# Altium PCB M3FMCWS_B.PcbDoc (part 1 of 2)
Units mil, origin at the board's own origin, x right, y up, seen from the top; angles counter-clockwise.
Board outline 3000 x 2800 mil, 4 copper layers (Top Layer, Layer 1, Layer 2, Bottom Layer), stack 60.556 mil thick; 145 components, 95 nets, 592 pads, 1074 vias.
Unrouted connection lines stored in the file: 9.
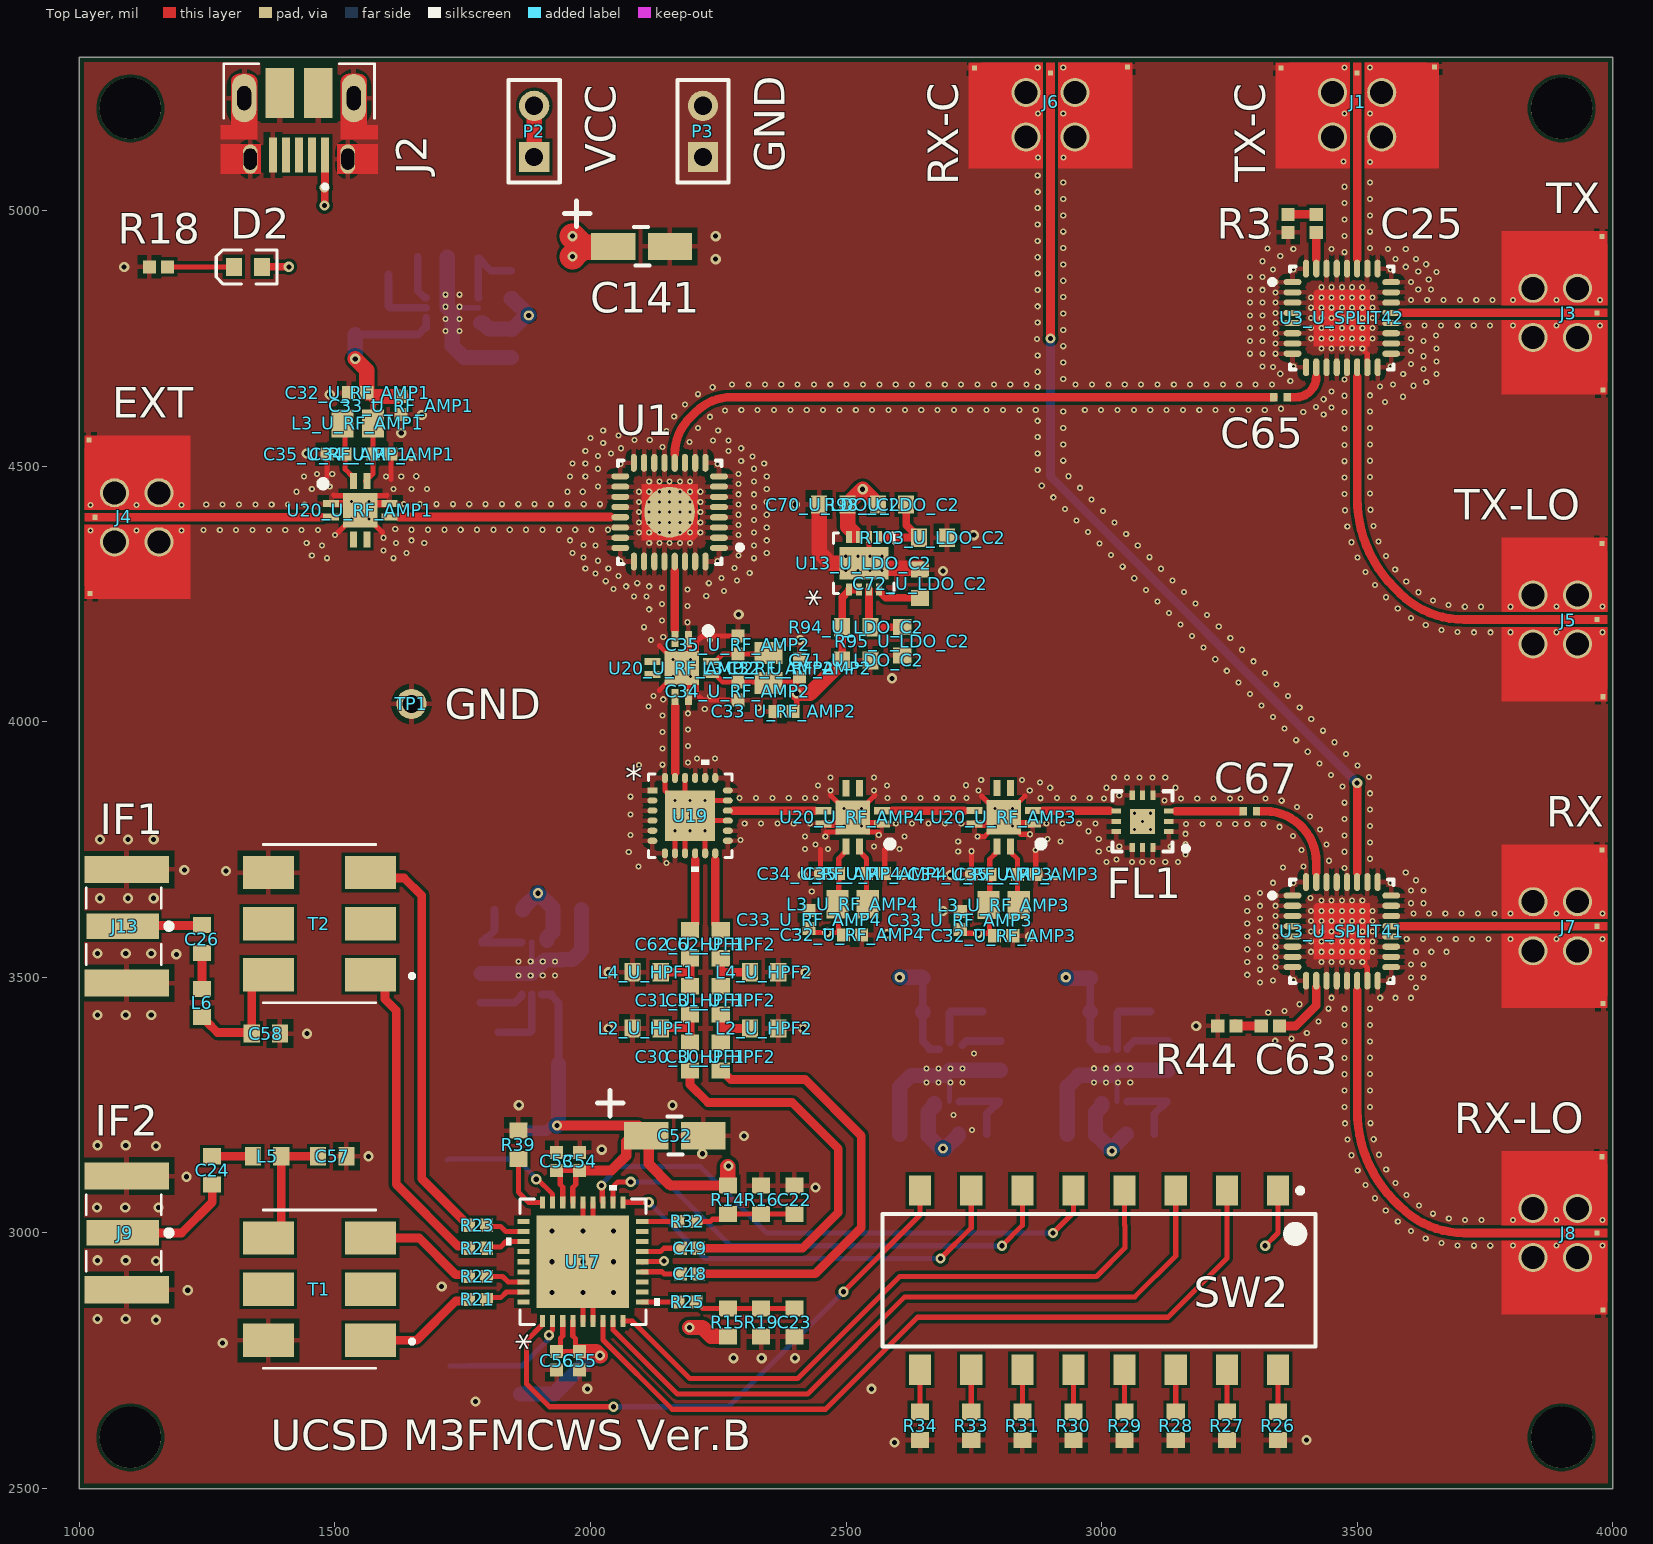
[diagram p0: Top Layer view]
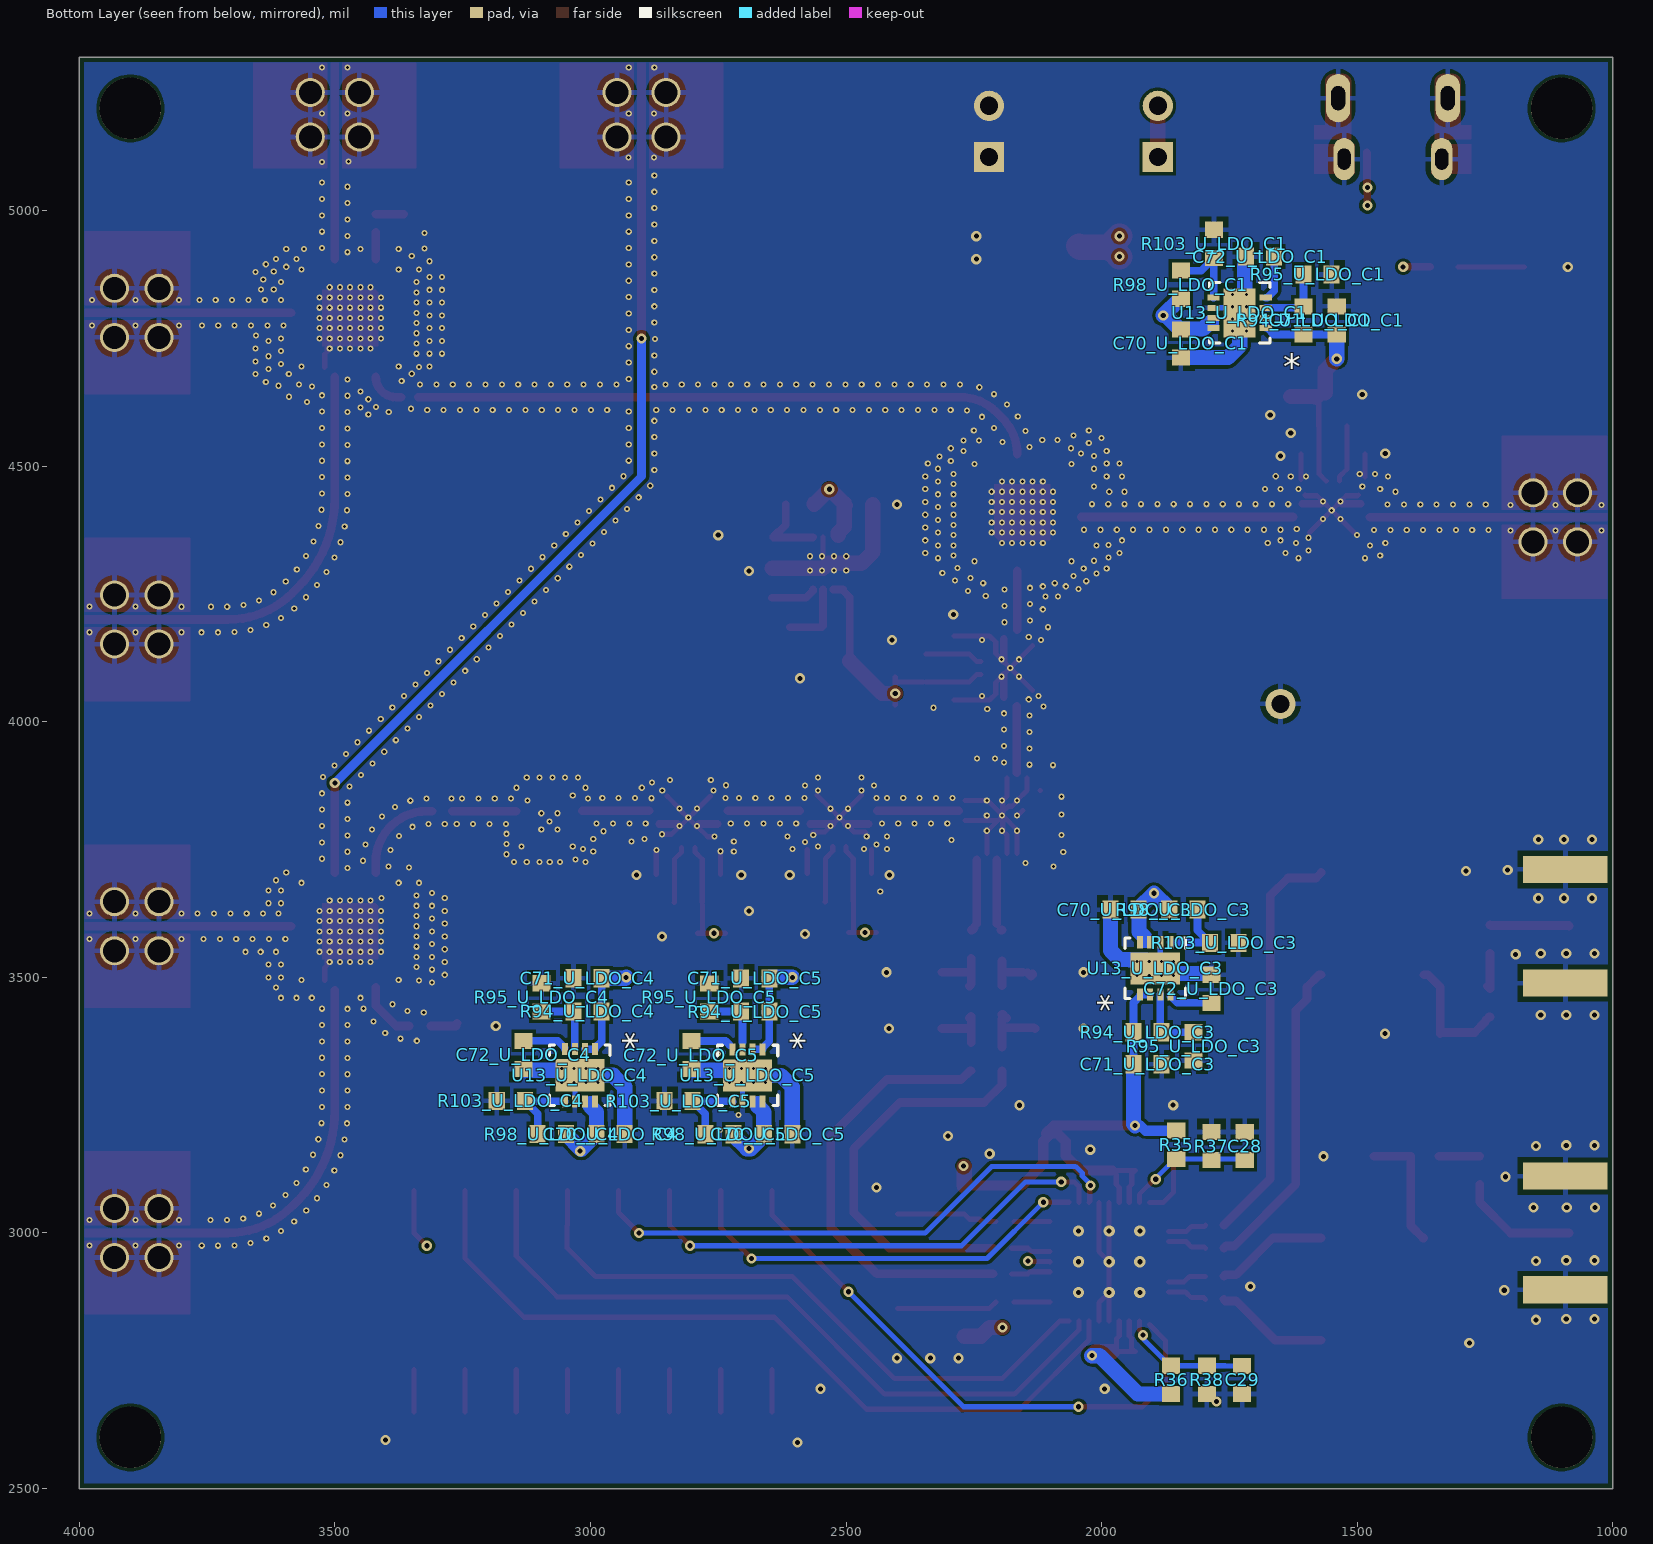
[diagram p1: Bottom Layer view, seen from below]
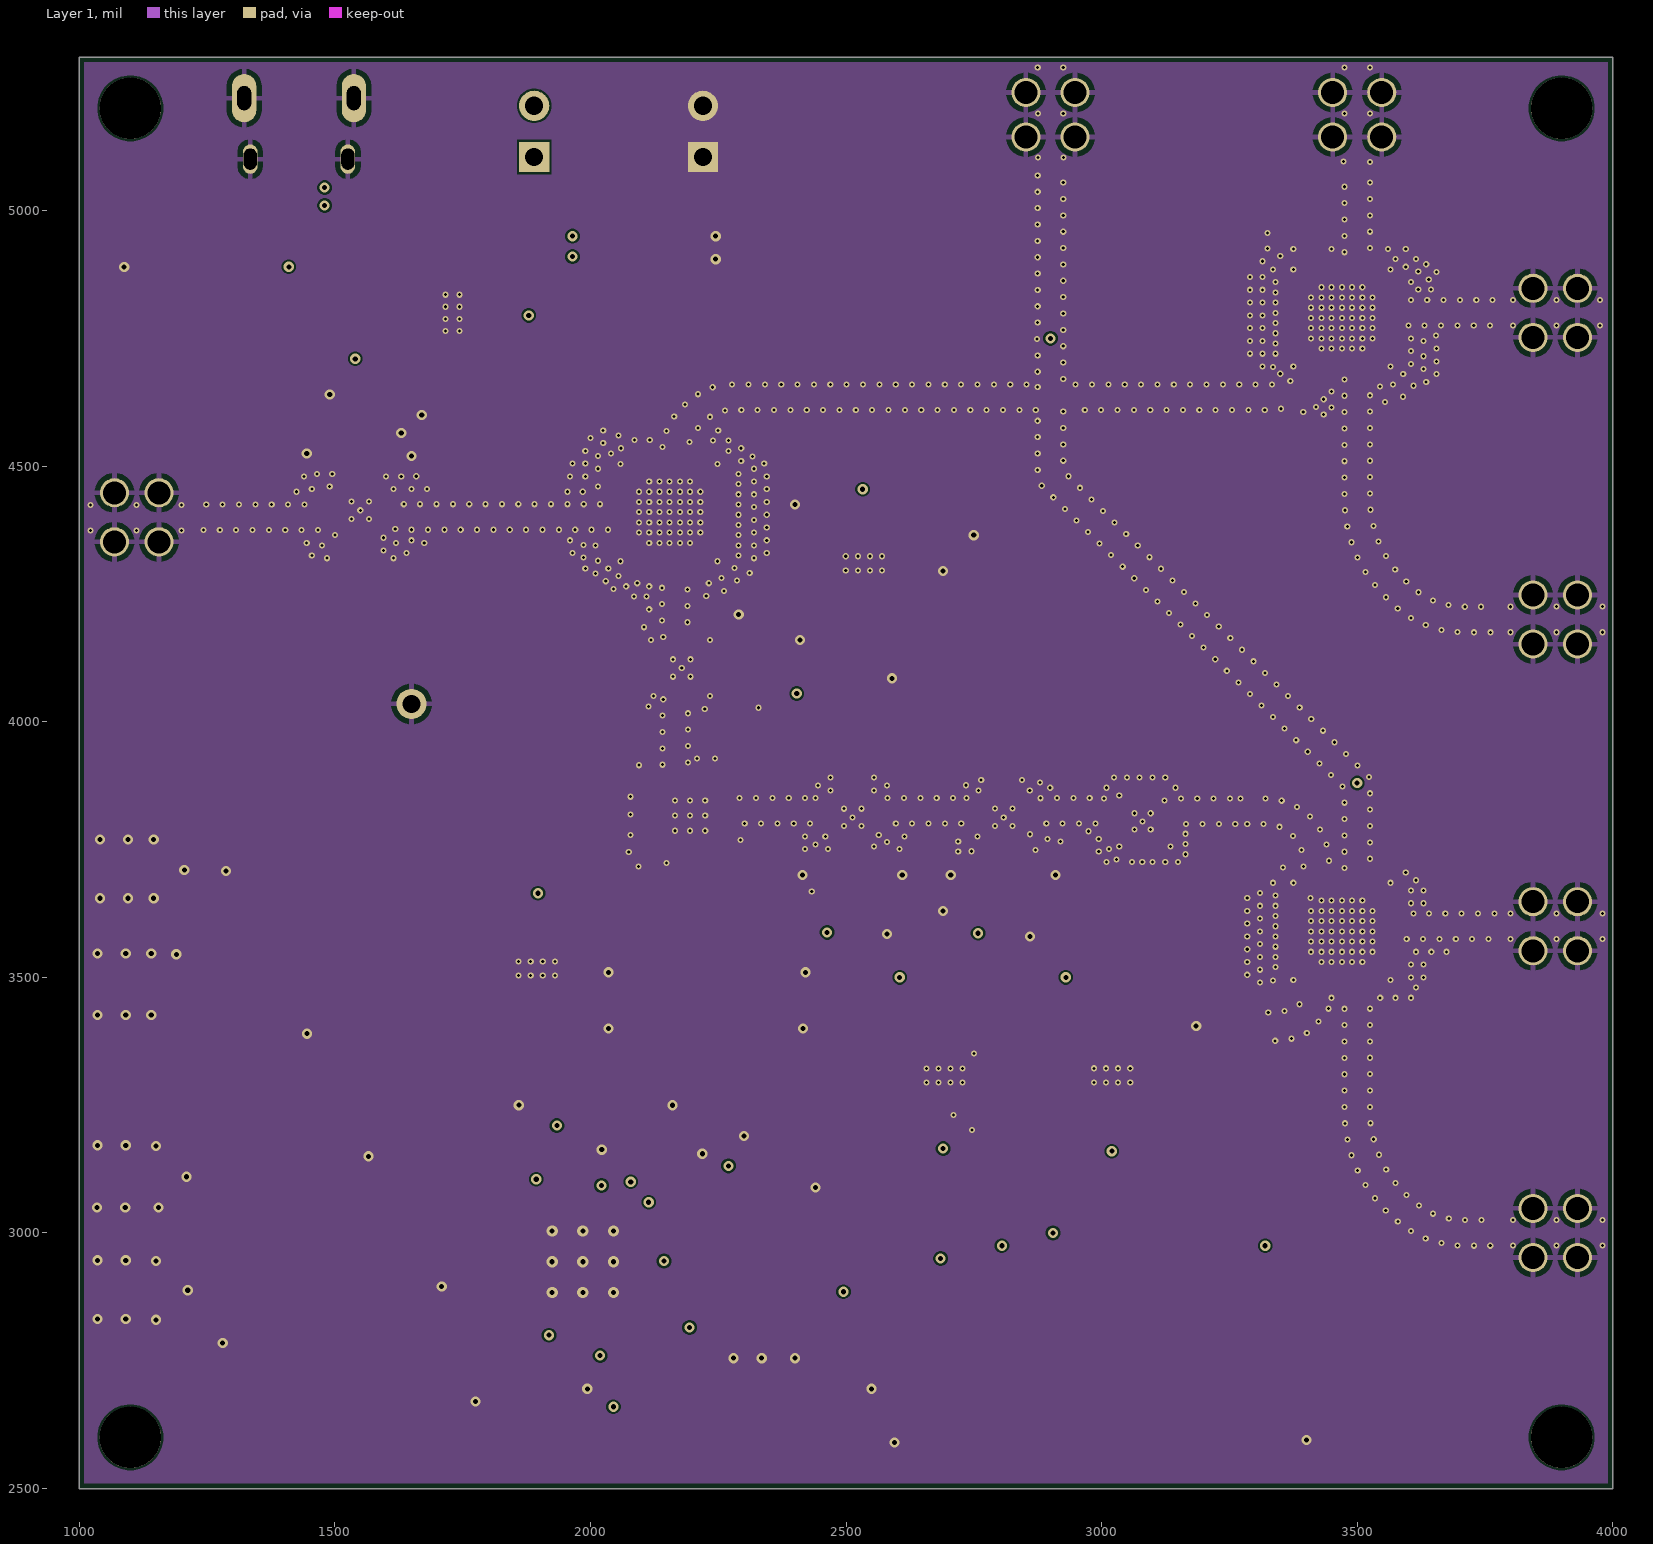
[diagram p2: Layer 1]
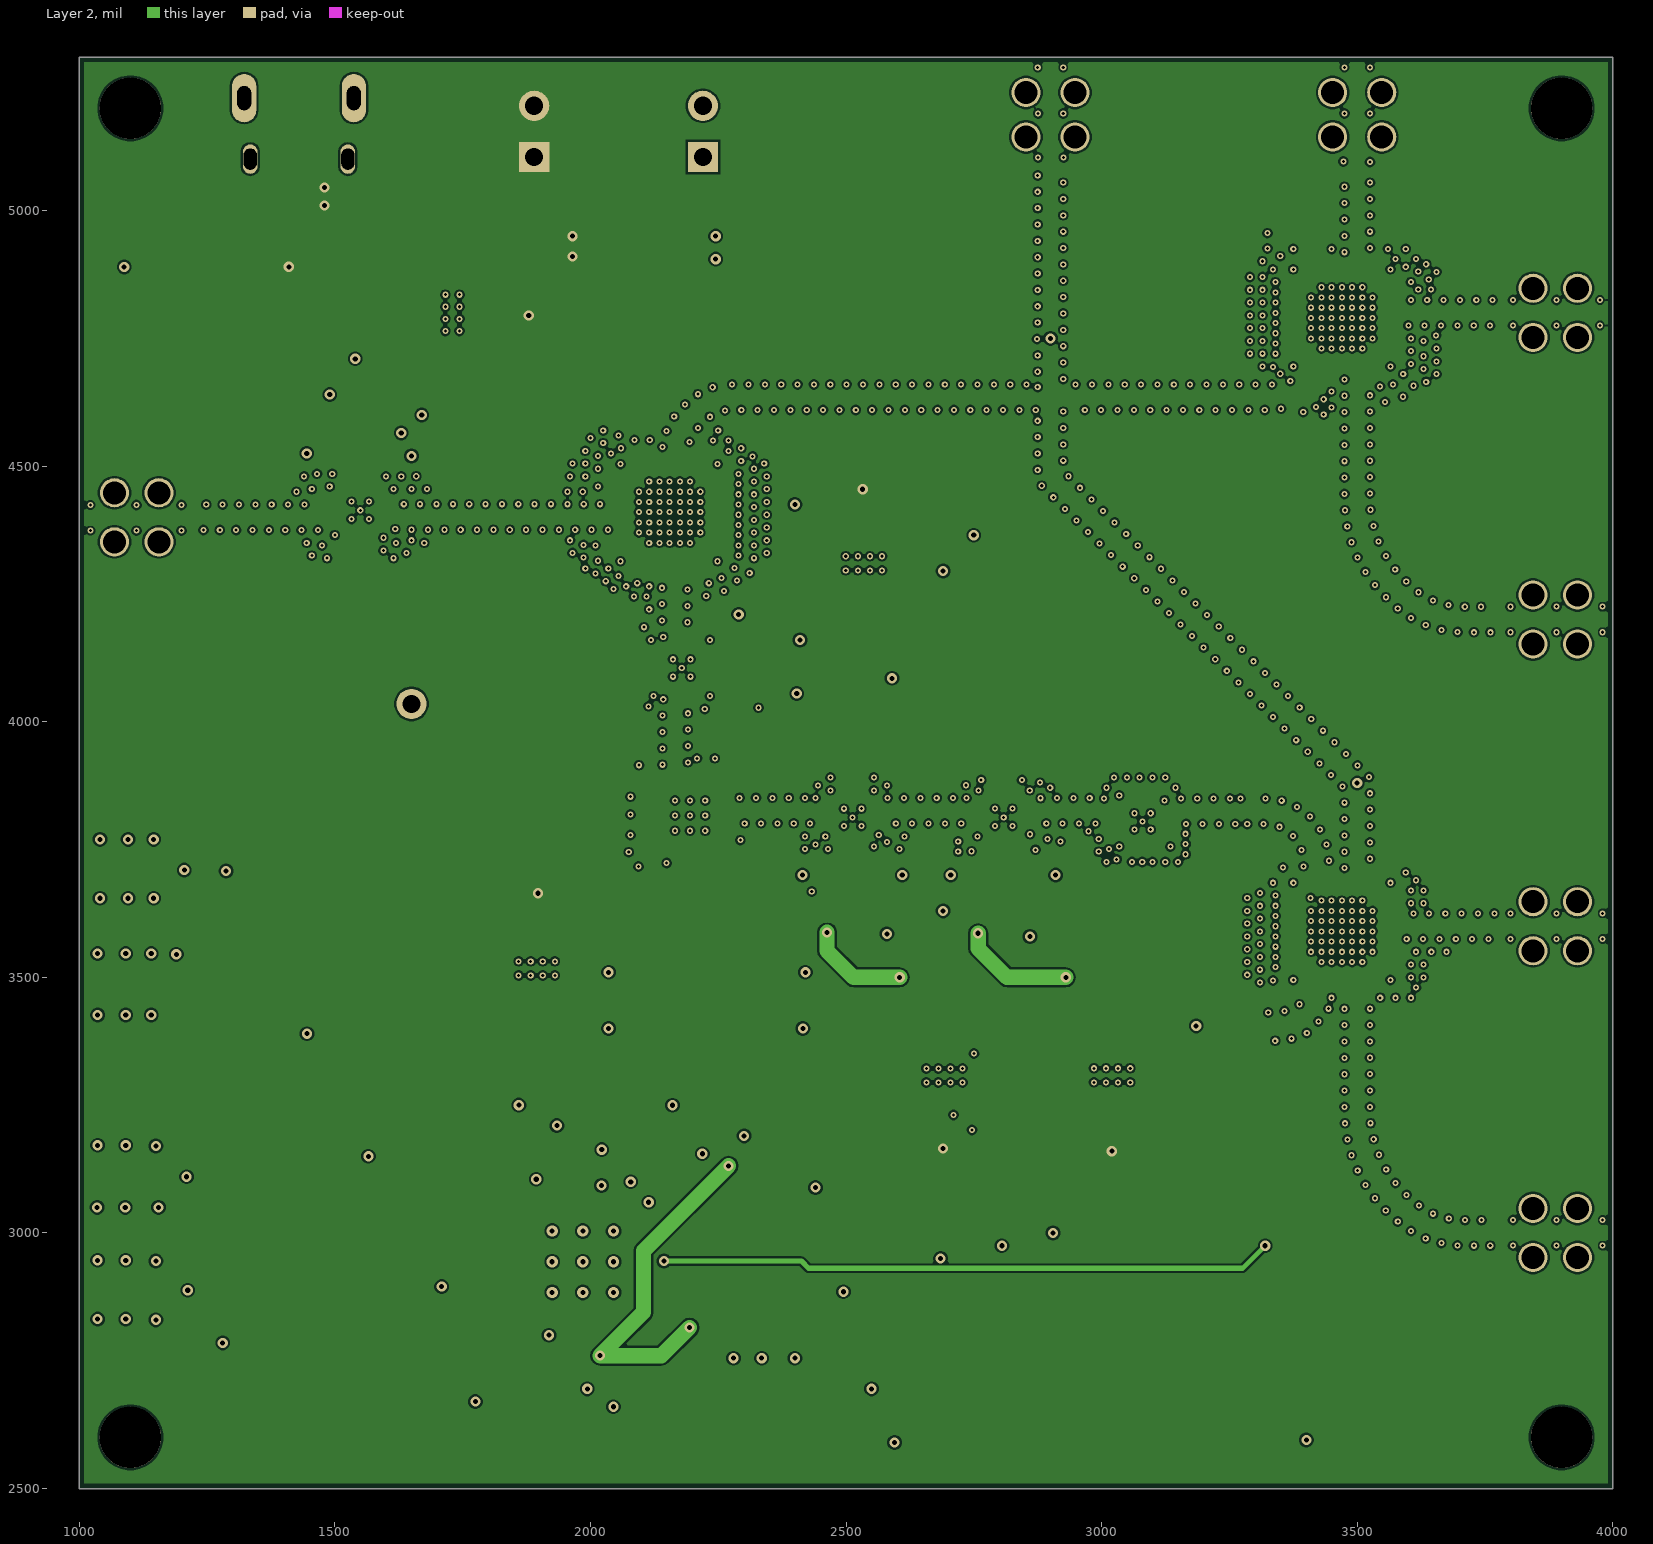
[diagram p3: Layer 2]

## Layer stack, top to bottom
Top Solder: solder mask 0.4, Solder Resist, Dk 3.5
Top Layer: signal copper 1.4
Dielectric 2: prepreg 10, RO4350, Dk 3.53
Layer 1: signal copper 1.378
Dielectric 1: core 35, FR4, Dk 4.8
Layer 2: signal copper 1.378
Dielectric 3: prepreg 10, RO4350, Dk 3.53
Bottom Layer: signal copper 1.4
Bottom Solder: solder mask 0.4, Solder Resist, Dk 3.5

## Board outline
1000,2500 4000,2500 4000,5300 1000,5300

## Design rules (kind name [scope] priority, off if disabled: settings)
BoardOutlineClearance [All] p1: gap=10 ignorepadtopadclearanceinfootprint=FALSE
Clearance BOT_POLY_POUR [InNamedPolygon('GND_L04_P019')] p1: gap=6 ignorepadtopadclearanceinfootprint=FALSE
Clearance TOP_POLY_POUR [InNamedPolygon('GND_L01_P016')] p2: gap=6 ignorepadtopadclearanceinfootprint=FALSE
Clearance [All] p3: gap=4 ignorepadtopadclearanceinfootprint=TRUE
ComponentClearance [All] p1: gap=4 collisioncheckmode=3 verticalgap=10 showdistances=FALSE
HoleSize [All] p1: absolutevalues=TRUE maxlimit=150 minlimit=1 maxpercent=80.000 minpercent=20.000
MinimumSolderMaskSliver [All] p1: minsoldermaskwidth=3.9
PlaneConnect [All] p1: pad.planeconnectstyle=Relief pad.reliefexpansion=20 pad.reliefentries=4 pad.reliefconductorwidth=10 pad.reliefairgap=10 via.planeconnectstyle=Direct via.reliefexpansion=20 via.reliefentries=4 via.reliefconductorwidth=10 via.reliefairgap=10
PolygonConnect [All] p1: thpad.connectstyle=Relief thpad.reliefconductorwidth=10 thpad.reliefentries=4 thpad.polygonreliefangle="90 Angle" thpad.airgapwidth=10 smdpad.connectstyle=Relief smdpad.reliefconductorwidth=10 smdpad.reliefentries=4 smdpad.polygonreliefangle="90 Angle" smdpad.airgapwidth=10 via.connectstyle=Direct via.reliefconductorwidth=10 via.reliefentries=4 via.polygonreliefangle="90 Angle" via.airgapwidth=10
RoomDefinition U_LDO_C5 [InComponentClass('U_LDO_C5')] p1: confinementstyle=ConfineIn formatcopy=TRUE lockcomponents=FALSE outline 2804.53,3161.1 2575.59,3161.1 2575.59,3225.04 2580.91,3225.04 2580.91,3399.72 2620.59,3399.72 2620.59,3530.04 2734.53,3530.04 2734.53,3517.6 2799.53,3517.6 2799.53,3405.04 2834.53,3405.04 2834.53,3290.04 2884.53,3290.04 2884.53,3226.1 2804.53,3226.1
RoomDefinition U_LDO_C4 [InComponentClass('U_LDO_C4')] p2: confinementstyle=ConfineIn formatcopy=TRUE lockcomponents=FALSE outline 3132.54,3161.35 2903.6,3161.35 2903.6,3225.29 2908.92,3225.29 2908.92,3399.97 2948.6,3399.97 2948.6,3530.29 3062.54,3530.29 3062.54,3517.85 3127.54,3517.85 3127.54,3405.29 3162.54,3405.29 3162.54,3290.29 3212.54,3290.29 3212.54,3226.35 3132.54,3226.35
RoomDefinition U_LDO_C1 [InComponentClass('U_LDO_C1')] p3: confinementstyle=ConfineIn formatcopy=TRUE lockcomponents=FALSE outline 1748.03,4991.97 1811.97,4991.97 1811.97,4911.97 1876.97,4911.97 1876.97,4683.03 1813.03,4683.03 1813.03,4688.35 1638.35,4688.35 1638.35,4728.03 1508.03,4728.03 1508.03,4841.97 1520.47,4841.97 1520.47,4906.97 1633.03,4906.97 1633.03,4941.97 1748.03,4941.97
RoomDefinition U_RF_AMP2 [InComponentClass('U_RF_AMP2')] p4: confinementstyle=ConfineIn formatcopy=TRUE lockcomponents=FALSE outline 2090,4016.53 2090,4195 2267.29,4195 2267.29,4191.57 2312.13,4191.57 2312.13,4166.26 2386.11,4166.26 2386.11,4146.57 2432.13,4146.57 2432.13,4063.77 2420.05,4063.77 2420.05,3996.69 2337.24,3996.69 2337.24,4016.53
RoomDefinition U_LDO_C2 [InComponentClass('U_LDO_C2')] p5: confinementstyle=ConfineIn formatcopy=TRUE lockcomponents=FALSE outline 2418.03,4456.97 2418.03,4393.03 2423.35,4393.03 2423.35,4218.35 2463.03,4218.35 2463.03,4088.03 2576.97,4088.03 2576.97,4100.47 2641.97,4100.47 2641.97,4213.03 2676.97,4213.03 2676.97,4328.03 2726.97,4328.03 2726.97,4391.97 2646.97,4391.97 2646.97,4456.97
RoomDefinition U_LDO_C3 [InComponentClass('U_LDO_C3')] p6: confinementstyle=ConfineIn formatcopy=TRUE lockcomponents=FALSE outline 1853.05,3298.03 1966.98,3298.03 1966.98,3425.91 2006.66,3425.91 2006.66,3600.59 2011.98,3600.59 2011.98,3664.53 1783.05,3664.53 1783.05,3599.53 1703.05,3599.53 1703.05,3535.59 1753.05,3535.59 1753.05,3420.59 1788.05,3420.59 1788.05,3308.03 1853.05,3308.03
RoomDefinition U_MIXER [InComponentClass('U_MIXER')] p7: confinementstyle=ConfineIn formatcopy=TRUE lockcomponents=FALSE outline 2059.26,3702.76 2059.26,3930 2300,3930 2300,3702.76
RoomDefinition U_RF_AMP4 [InComponentClass('U_RF_AMP4')] p8: confinementstyle=ConfineIn formatcopy=TRUE lockcomponents=FALSE outline 2404.5,3571.51 2404.5,3654.31 2424.35,3654.31 2424.35,3901.56 2602.82,3901.56 2602.82,3724.27 2599.39,3724.27 2599.39,3679.43 2574.08,3679.43 2574.08,3605.45 2554.39,3605.45 2554.39,3559.43 2471.59,3559.43 2471.59,3571.51
RoomDefinition U_RF_AMP3 [InComponentClass('U_RF_AMP3')] p9: confinementstyle=ConfineIn formatcopy=TRUE lockcomponents=FALSE outline 2700,3569.95 2700,3652.76 2719.84,3652.76 2719.84,3900 2898.31,3900 2898.31,3722.71 2894.89,3722.71 2894.89,3677.87 2869.57,3677.87 2869.57,3603.89 2849.89,3603.89 2849.89,3557.87 2767.09,3557.87 2767.09,3569.95
RoomDefinition U_RF_AMP1 [InComponentClass('U_RF_AMP1')] p10: confinementstyle=ConfineIn formatcopy=TRUE lockcomponents=FALSE outline 1638.47,4325 1460,4325 1460,4502.29 1461.14,4502.29 1461.14,4547.13 1483.74,4547.13 1483.74,4621.11 1503.43,4621.11 1503.43,4667.13 1586.23,4667.13 1586.23,4660.05 1653.31,4660.05 1653.31,4577.24 1638.47,4577.24
RoutingVias [All] p1: holewidth=8 width=20 viastyle="Through Hole" minholewidth=6 minwidth=12 maxholewidth=28 maxwidth=50
SilkToSilkClearance [All] p1: silktosilkclearance=4
SilkToSolderMaskClearance [IsPad] p1: minsilkscreentomaskgap=4 clearancetoexposedcopper=FALSE
SolderMaskExpansion [All] p1: expansion=2 istentingtop=FALSE
Width [All] p1: maxlimit=50 minlimit=4 preferedwidth=17
24 further rules are at their usual default settings.

## Classes and differential pairs
component class U_SPLIT2: U1
channel class SPLIT4: U_SPLIT41 U_SPLIT42
component class U_SPLIT41: U3_U_SPLIT41
component class U_SPLIT42: U3_U_SPLIT42
channel class HPF: U_HPF1 U_HPF2
channel class LDO_C: U_LDO_C1 U_LDO_C2 U_LDO_C3 U_LDO_C4 U_LDO_C5
channel class RF_AMP: U_RF_AMP1 U_RF_AMP2 U_RF_AMP3 U_RF_AMP4
component class U_RF_AMP4: C32_U_RF_AMP4 C33_U_RF_AMP4 C34_U_RF_AMP4 C35_U_RF_AMP4 L3_U_RF_AMP4 U20_U_RF_AMP4
component class U_RF_AMP3: C32_U_RF_AMP3 C33_U_RF_AMP3 C34_U_RF_AMP3 C35_U_RF_AMP3 L3_U_RF_AMP3 U20_U_RF_AMP3
component class U_RF_AMP2: C32_U_RF_AMP2 C33_U_RF_AMP2 C34_U_RF_AMP2 C35_U_RF_AMP2 L3_U_RF_AMP2 U20_U_RF_AMP2
component class U_RF_AMP1: C32_U_RF_AMP1 C33_U_RF_AMP1 C34_U_RF_AMP1 C35_U_RF_AMP1 L3_U_RF_AMP1 U20_U_RF_AMP1
component class U_POWER: C141 D2 J2 P2 P3 R18 TP1
component class U_MIXER: U19
component class U_HPF2: C30_U_HPF2 C31_U_HPF2 C62_U_HPF2 L2_U_HPF2 L4_U_HPF2
component class U_HPF1: C30_U_HPF1 C31_U_HPF1 C62_U_HPF1 L2_U_HPF1 L4_U_HPF1
component class U_BB_AMP: C22 C23 C24 C26 C28 C29 C48 C49 C52 C53 C54 C55 C56 C57 C58 L5 L6 R14 R15 R16 R19 R21 R22 R23 R24 R25 R26 R27 R28 R29 R30 R31 R32 R33 R34 R35 R36 R37 R38 R39 SW2 T1 T2 U17
component class U_LDO_C5: C70_U_LDO_C5 C71_U_LDO_C5 C72_U_LDO_C5 R94_U_LDO_C5 R95_U_LDO_C5 R98_U_LDO_C5 R103_U_LDO_C5 U13_U_LDO_C5
component class U_LDO_C4: C70_U_LDO_C4 C71_U_LDO_C4 C72_U_LDO_C4 R94_U_LDO_C4 R95_U_LDO_C4 R98_U_LDO_C4 R103_U_LDO_C4 U13_U_LDO_C4
component class U_LDO_C3: C70_U_LDO_C3 C71_U_LDO_C3 C72_U_LDO_C3 R94_U_LDO_C3 R95_U_LDO_C3 R98_U_LDO_C3 R103_U_LDO_C3 U13_U_LDO_C3
component class U_LDO_C2: C70_U_LDO_C2 C71_U_LDO_C2 C72_U_LDO_C2 R94_U_LDO_C2 R95_U_LDO_C2 R98_U_LDO_C2 R103_U_LDO_C2 U13_U_LDO_C2
component class U_LDO_C1: C70_U_LDO_C1 C71_U_LDO_C1 C72_U_LDO_C1 R94_U_LDO_C1 R95_U_LDO_C1 R98_U_LDO_C1 R103_U_LDO_C1 U13_U_LDO_C1
component class M3_FMCW: C25 C63 C65 C67 FL1 J1 J3 J4 J5 J6 J7 J8 J9 J13 R3 R44

## Components (designator, comment, footprint, x,y, rotation, side; value= is the part's Value field where it differs from the comment)
C22 "0.1uF" SMD-0603 2398.98,3065 r270 top
C23 "0.1uF" SMD-0603 2398.98,2825 r90 top
C24 "0.1uF" SMD-0603 1260,3122.56 r270 top
C25 "100nF" SMD-0402 3420,4975 r270 top
C26 "0.1uF" SMD-0603 1240,3575 r90 top
C28 "0.1uF" SMD-0603 1720,3170 r270 bottom
C29 "0.1uF" SMD-0603 1725,2712.44 r90 bottom
C30_U_HPF1 "6800pF" SMD-0603 2195,3345 r90 top (schematic designator C30)
C30_U_HPF2 "6800pF" SMD-0603 2255,3345 r90 top (schematic designator C30)
C31_U_HPF1 "6800pF" SMD-0603 2195,3455 r90 top (schematic designator C31)
C31_U_HPF2 "6800pF" SMD-0603 2255,3455 r90 top (schematic designator C31)
C32_U_RF_AMP1 "5.6pF" SMD-0402 1544.83,4643.65 r0 top (schematic designator C32)
C32_U_RF_AMP2 "5.6pF" SMD-0402 2408.65,4105.17 r270 top (schematic designator C32)
C32_U_RF_AMP3 "5.6pF" SMD-0402 2808.49,3581.35 r180 top (schematic designator C32)
C32_U_RF_AMP4 "5.6pF" SMD-0402 2512.99,3582.91 r180 top (schematic designator C32)
C33_U_RF_AMP1 "18pF" SMD-0402 1629.83,4618.65 r90 top (schematic designator C33)
C33_U_RF_AMP2 "18pF" SMD-0402 2378.65,4020.17 r0 top (schematic designator C33)
C33_U_RF_AMP3 "18pF" SMD-0402 2723.49,3611.35 r270 top (schematic designator C33)
C33_U_RF_AMP4 "18pF" SMD-0402 2427.99,3612.91 r270 top (schematic designator C33)
C34_U_RF_AMP1 "1nF" SMD-0402 1592.54,4523.65 r0 top (schematic designator C34)
C34_U_RF_AMP2 "1nF" SMD-0402 2288.65,4060.17 r270 top (schematic designator C34)
C34_U_RF_AMP3 "1nF" SMD-0402 2763.49,3701.35 r180 top (schematic designator C34)
C34_U_RF_AMP4 "1nF" SMD-0402 2467.99,3702.91 r180 top (schematic designator C34)
C35_U_RF_AMP1 "0.1uF" SMD-0402 1502.54,4523.65 r180 top (schematic designator C35)
C35_U_RF_AMP2 "0.1uF" SMD-0402 2288.65,4150.17 r90 top (schematic designator C35)
C35_U_RF_AMP3 "0.1uF" SMD-0402 2853.49,3701.35 r0 top (schematic designator C35)
C35_U_RF_AMP4 "0.1uF" SMD-0402 2557.99,3702.91 r0 top (schematic designator C35)
C48 "0.01uF" SMD-0402 2193.98,2920 r180 top
C49 "0.01uF" SMD-0402 2193.98,2970 r180 top
C52 "10uF" CAP_TANT_1206_POL 2165,3190 r0 top
C53 "1nF" SMD-0402 1933.98,3140 r270 top
C54 "1nF" SMD-0402 1978.98,3140 r270 top
C55 "1nF" SMD-0402 1978.98,2750 r90 top
C56 "1nF" SMD-0402 1933.98,2750 r90 top
C57 "910pF" SMD-0603 1495,3150 r0 top
C58 "910pF" SMD-0603 1365,3390 r180 top
C62_U_HPF1 "0" SMD-0603 2195,3565 r90 top (schematic designator C62)
C62_U_HPF2 "0" SMD-0603 2255,3565 r90 top (schematic designator C62)
C63 "100nF" SMD-0402 3330,3405 r0 top
C65 "5600pF" Johanson-0201 3350,4635 r180 top
C67 "5600pF" Johanson-0201 3290,3825 r180 top
C70_U_LDO_C1 "10uF" SMD-0603 1845,4740 r90 bottom (schematic designator C70)
C70_U_LDO_C2 "10uF" SMD-0603 2475,4425 r0 top (schematic designator C70)
C70_U_LDO_C3 "10uF" SMD-0603 1955.01,3632.56 r180 bottom (schematic designator C70)
C70_U_LDO_C4 "10uF" SMD-0603 2960.57,3193.32 r0 bottom (schematic designator C70)
C70_U_LDO_C5 "10uF" SMD-0603 2632.56,3193.07 r0 bottom (schematic designator C70)
C71_U_LDO_C1 "1uF" SMD-0603 1540,4785 r270 bottom (schematic designator C71)
C71_U_LDO_C2 "1uF" SMD-0603 2520,4120 r180 top (schematic designator C71)
C71_U_LDO_C3 "1uF" SMD-0603 1910.01,3330 r0 bottom (schematic designator C71)
C71_U_LDO_C4 "1uF" SMD-0603 3005.57,3498.32 r180 bottom (schematic designator C71)
C71_U_LDO_C5 "1uF" SMD-0603 2677.56,3498.07 r180 bottom (schematic designator C71)
C72_U_LDO_C1 "1nF" SMD-0603 1690,4910 r0 bottom (schematic designator C72)
C72_U_LDO_C2 "1nF" SMD-0603 2645,4270 r90 top (schematic designator C72)
C72_U_LDO_C3 "1nF" SMD-0603 1785.01,3477.56 r90 bottom (schematic designator C72)
C72_U_LDO_C4 "1nF" SMD-0603 3130.57,3348.32 r270 bottom (schematic designator C72)
C72_U_LDO_C5 "1nF" SMD-0603 2802.56,3348.07 r270 bottom (schematic designator C72)
C141 "47uF" CAP_TANT_1206_POL 2100,4930 r0 top
D2 "LED0603" LED-SMD-0603 1330,4890 r180 top
FL1 "XHF-143M+" PQFN12-XHF-143M 3080.08,3805 r180 top
J1 "JOHN-142-0761-801" JOHN-142-0761-801 3500,5300 r0 top
J2 "10103594-0001LF" AMPHENOL_10103594-0001LF 1430,5220 r180 top
J3 "JOHN-142-0761-801" JOHN-142-0761-801 4000,4800 r270 top
J4 "JOHN-142-0761-801" JOHN-142-0761-801 1000,4400 r90 top locked
J5 "JOHN-142-0761-801" JOHN-142-0761-801 4000,4200 r270 top
J6 "JOHN-142-0761-801" JOHN-142-0761-801 2900,5300 r0 top
J7 "JOHN-142-0761-801" JOHN-142-0761-801 4000,3600 r270 top
J8 "JOHN-142-0761-801" JOHN-142-0761-801 4000,3000 r270 top
J9 "SMA-J-P-H-ST-EM1" SMA-J-P-H-ST-EM1 1085,3000 r270 top
J13 "SMA-J-P-H-ST-EM1" SMA-J-P-H-ST-EM1 1085,3600 r270 top
L2_U_HPF1 "18uH" SMD-0603 2110,3400 r0 top (schematic designator L2)
L2_U_HPF2 "18uH" SMD-0603 2340,3400 r180 top (schematic designator L2)
L3_U_RF_AMP1 "3.3nH" SMD-0805 1544.83,4583.65 r0 top (schematic designator L3)
L3_U_RF_AMP2 "3.3nH" SMD-0805 2348.65,4105.17 r270 top (schematic designator L3)
L3_U_RF_AMP3 "3.3nH" SMD-0805 2808.49,3641.35 r180 top (schematic designator L3)
L3_U_RF_AMP4 "3.3nH" SMD-0805 2512.99,3642.91 r180 top (schematic designator L3)
L4_U_HPF1 "18uH_DNI" SMD-0603 2110,3510 r0 top (schematic designator L4)
L4_U_HPF2 "18uH_DNI" SMD-0603 2340,3510 r180 top (schematic designator L4)
L5 "2.2uH" SMD-0603 1367.56,3150 r180 top
L6 "2.2uH" SMD-0603 1240,3450 r90 top
P2 "Header 2" HDR1X2 1890,5105 r90 top
P3 "Header 2" HDR1X2 2220,5105 r90 top
R3 "50" SMD-0402 3365,4975 r90 top
R14 "2.37k" SMD-0603 2268.98,3065 r90 top
R15 "2.37k" SMD-0603 2268.98,2825 r270 top
R16 "2.37k" SMD-0603 2333.98,3065 r270 top
R18 "2k" SMD-0402 1155,4890 r0 top
R19 "2.37k" SMD-0603 2333.98,2825 r90 top
R21 "49.9" SMD-0402 1778.98,2870 r180 top
R22 "49.9" SMD-0402 1778.98,2915 r180 top
R23 "49.9" SMD-0402 1778.98,3015 r180 top
R24 "49.9" SMD-0402 1778.98,2970 r180 top
R25 "49.9" SMD-0402 2188.98,2865 r180 top
R26 "49.9" SMD-0603 3345,2622.56 r270 top
R27 "49.9" SMD-0603 3245,2622.56 r270 top
R28 "49.9" SMD-0603 3145,2622.56 r270 top
R29 "49.9" SMD-0603 3045,2622.56 r270 top
R30 "49.9" SMD-0603 2945,2622.56 r270 top
R31 "49.9" SMD-0603 2845,2622.56 r270 top
R32 "49.9" SMD-0402 2188.98,3022.56 r180 top
R33 "49.9" SMD-0603 2745,2622.56 r270 top
R34 "49.9" SMD-0603 2645,2622.56 r270 top
R35 "3.01k" SMD-0603 1853.98,3172.56 r90 bottom
R36 "3.01k" SMD-0603 1863.98,2712.56 r270 bottom
R37 "1.00k" SMD-0603 1785,3170 r270 bottom
R38 "1.00k" SMD-0603 1793.98,2712.56 r90 bottom
R39 "4.99k" SMD-0603 1858.98,3172.56 r270 top
R44 "50" SMD-0402 3245,3405 r0 top
R94_U_LDO_C1 "44.2k" SMD-0603 1605,4785 r270 bottom (schematic designator R94)
R94_U_LDO_C2 "44.2k" SMD-0603 2520,4185 r180 top (schematic designator R94)
R94_U_LDO_C3 "44.2k" SMD-0603 1910.01,3392.56 r0 bottom (schematic designator R94)
R94_U_LDO_C4 "44.2k" SMD-0603 3005.57,3433.32 r180 bottom (schematic designator R94)
R94_U_LDO_C5 "44.2k" SMD-0603 2677.56,3433.07 r180 bottom (schematic designator R94)
R95_U_LDO_C1 "14.0k" SMD-0603 1577.44,4875 r0 bottom (schematic designator R95)
R95_U_LDO_C2 "14.0k" SMD-0603 2610,4157.44 r90 top (schematic designator R95)
R95_U_LDO_C3 "14.0k" SMD-0603 1820.01,3365 r90 bottom (schematic designator R95)
R95_U_LDO_C4 "14.0k" SMD-0603 3095.57,3460.88 r270 bottom (schematic designator R95)
R95_U_LDO_C5 "14.0k" SMD-0603 2767.56,3460.63 r270 bottom (schematic designator R95)
R98_U_LDO_C1 "1k" SMD-0603 1845,4855 r90 bottom (schematic designator R98)
R98_U_LDO_C2 "1k" SMD-0603 2590,4425 r0 top (schematic designator R98)
R98_U_LDO_C3 "1k" SMD-0603 1840.01,3632.56 r180 bottom (schematic designator R98)
R98_U_LDO_C4 "1k" SMD-0603 3075.57,3193.32 r0 bottom (schematic designator R98)
R98_U_LDO_C5 "1k" SMD-0603 2747.56,3193.07 r0 bottom (schematic designator R98)
R103_U_LDO_C1 "0_DNI" SMD-0603 1780,4935 r270 bottom (schematic designator R103)
R103_U_LDO_C2 "0_DNI" SMD-0603 2670,4360 r180 top (schematic designator R103)
R103_U_LDO_C3 "0_DNI" SMD-0603 1760.01,3567.56 r0 bottom (schematic designator R103)
R103_U_LDO_C4 "0_DNI" SMD-0603 3155.57,3258.32 r180 bottom (schematic designator R103)
R103_U_LDO_C5 "0_DNI" SMD-0603 2827.56,3258.07 r180 bottom (schematic designator R103)
SW2 "A6S-8104-H" A6S-8101-H 2995,2907.56 r270 top
T1 "ADT1-1+" XFMR_ADT1-1+ 1470,2890 r180 top
T2 "ADT1-1+" XFMR_ADT1-1+ 1470,3605 r180 top
TP1 "TSW-101-15-T-S" TSW-101-15-T-S 1650,4035 r0 top
U1 "EP2RKU+" EP2RKU+ 2155,4410 r180 top
U3_U_SPLIT41 "EP4RKU+" EP4RKU+ 3470,3590 r0 top locked (schematic designator U3)
U3_U_SPLIT42 "EP4RKU+" EP4RKU+ 3470,4790 r0 top locked (schematic designator U3)
U13_U_LDO_C1 "ADM7172ACPZ" LFCSP_WD-8 1730,4800 r0 bottom value=Value (schematic designator U13)
U13_U_LDO_C2 "ADM7172ACPZ" LFCSP_WD-8 2535,4310 r90 top value=Value (schematic designator U13)
U13_U_LDO_C3 "ADM7172ACPZ" LFCSP_WD-8 1895.01,3517.56 r90 bottom value=Value (schematic designator U13)
U13_U_LDO_C4 "ADM7172ACPZ" LFCSP_WD-8 3020.57,3308.32 r270 bottom value=Value (schematic designator U13)
U13_U_LDO_C5 "ADM7172ACPZ" LFCSP_WD-8 2692.56,3308.07 r270 bottom value=Value (schematic designator U13)
U17 "LMH6882SQ/NOPB" NJK36_TEX 1985.24,2943.68 r90 top
U19 "HMC8191LC4" HMC8191_E-24-1 2195,3816.38 r0 top
U20_U_RF_AMP1 "AVA-183A+" "AVA-183A+ QFN" 1549.83,4413.65 r0 top (schematic designator U20)
U20_U_RF_AMP2 "AVA-183A+" "AVA-183A+ QFN" 2178.65,4105.17 r270 top (schematic designator U20)
U20_U_RF_AMP3 "AVA-183A+" "AVA-183A+ QFN" 2808.49,3813 r180 top (schematic designator U20)
U20_U_RF_AMP4 "AVA-183A+" "AVA-183A+ QFN" 2512.99,3812.91 r180 top (schematic designator U20)

## Footprints (in the part's own frame and the unit in brackets; to place one, negate y for a bottom-side part, rotate by r counter-clockwise, add the part's x,y. Pads: shape width x height; smd on the part's side, far side on the other; paste and mask are expansions set on the pad)
A6S-8101-H [mm] "SWITCH SLIDE DIP SPST, 8 Positions, IPC Medium Density"
  rect 1.5x1.1 smd: 1(-4.45,8.89) 2(-4.45,6.35) 3(-4.45,3.81) 4(-4.45,1.27) 5(-4.45,-1.27) 6(-4.45,-3.81) 7(-4.45,-6.35) 8(-4.45,-8.89) 9(4.45,-8.89) 10(4.45,-6.35) 11(4.45,-3.81) 12(4.45,-1.27) 13(4.45,1.27) 14(4.45,3.81) 15(4.45,6.35) 16(4.45,8.89)
  silkscreen extent -4.57,-10.75 3.3,10.75, body extent -3.2,-10.75 3.2,10.75, height 3.1
AMPHENOL_10103594-0001LF [mm] "USB - micro B USB 2.0 Receptacle Connector 5 Position Surface Mount, Right Angle; Through Hole"
  rect 0.4x1.75 smd mask+0.025: 1(-1.3,2.825) 2(-0.65,2.825) 3(0,2.825) 4(0.65,2.825) 5(1.3,2.825)
  oval 0.73x1.46 hole 0.65 slot 1.05 at 90 deg mask+0.025: 6(-2.425,3.03) 7(2.425,3.03)
  oval 1.2x2.4 hole 0.7 slot 1.2 at 90 deg mask+0.025: 8(-2.725,0) 9(2.725,0)
  oval 1.05x2.1 smd far side paste-2 mask+0: 10(-2.425,3.03) 11(2.425,3.03)
  rect 1.425x2.5 smd mask+0.025: S1(-0.962,-0.25) S2(0.962,-0.25)
  Top Layer region: -1.9,2.3 -3.9,2.3 -3.9,3.76 -1.9,3.76
  Top Layer region: 3.9,2.3 1.9,2.3 1.9,3.76 3.9,3.76
  Top Layer region: -2.075,-0.8 -2.076,-0.821 -2.077,-0.842 -2.08,-0.863 -2.084,-0.883 -2.089,-0.904 -2.095,-0.924 -2.102,-0.943 -2.11,-0.963 -2.119,-0.982 -2.129,-1 -2.14,-1.018 -2.151,-1.035 -2.164,-1.052 -2.178,-1.068 -2.192,-1.083 -2.207,-1.097 -2.223,-1.111 -2.24,-1.124 -2.257,-1.135 -2.275,-1.146 -2.293,-1.156 -2.312,-1.165 -2.332,-1.173 -2.351,-1.18 -2.371,-1.186 -2.392,-1.191 -2.412,-1.195 -2.433,-1.198 -2.454,-1.199 -2.475,-1.2 -2.975,-1.2 -2.996,-1.199 -3.017,-1.198 -3.038,-1.195 -3.058,-1.191 -3.079,-1.186 -3.099,-1.18 -3.118,-1.173 -3.138,-1.165 -3.157,-1.156 -3.175,-1.146 -3.193,-1.135 -3.21,-1.124 -3.227,-1.111 -3.243,-1.097 -3.258,-1.083 -3.272,-1.068 -3.286,-1.052 -3.299,-1.035 -3.31,-1.018 -3.321,-1 -3.331,-0.982 -3.34,-0.963 -3.348,-0.943 -3.355,-0.924 -3.361,-0.904 -3.366,-0.883 -3.37,-0.863 -3.373,-0.842 -3.374,-0.821 -3.375,-0.8 -3.375,1.35 -3.9,1.35 -3.9,2.05 -2.075,2.05
  Top Layer region: 3.9,1.35 3.375,1.35 3.375,-0.8 3.374,-0.821 3.373,-0.842 3.37,-0.863 3.366,-0.883 3.361,-0.904 3.355,-0.924 3.348,-0.943 3.34,-0.963 3.331,-0.982 3.321,-1 3.31,-1.018 3.299,-1.035 3.286,-1.052 3.272,-1.068 3.258,-1.083 3.243,-1.097 3.227,-1.111 3.21,-1.124 3.193,-1.135 3.175,-1.146 3.157,-1.156 3.138,-1.165 3.118,-1.173 3.099,-1.18 3.079,-1.186 3.058,-1.191 3.038,-1.195 3.017,-1.198 2.996,-1.199 2.975,-1.2 2.475,-1.2 2.454,-1.199 2.433,-1.198 2.412,-1.195 2.392,-1.191 2.371,-1.186 2.351,-1.18 2.332,-1.173 2.312,-1.165 2.293,-1.156 2.275,-1.146 2.257,-1.135 2.24,-1.124 2.223,-1.111 2.207,-1.097 2.192,-1.083 2.178,-1.068 2.164,-1.052 2.151,-1.035 2.14,-1.018 2.129,-1 2.119,-0.982 2.11,-0.963 2.102,-0.943 2.095,-0.924 2.089,-0.904 2.084,-0.883 2.08,-0.863 2.077,-0.842 2.076,-0.821 2.075,-0.8 2.075,2.05 3.9,2.05
  silkscreen extent -3.75,-1.7 3.75,4.5, body extent -4.02,-4.15 4.02,1.88, height 3.13
"AVA-183A+ QFN" [mm] "QFN66P300X300X89-9N"
  rect 0.8x0.35 smd mask+0.025: 1(-1.45,0.33) 2(-1.45,-0.33) 5(1.45,-0.33) 6(1.45,0.33)
  rect 0.35x0.8 smd mask+0.025: 3(-0.33,-1.45) 4(0.33,-1.45) 7(0.33,1.45) 8(-0.33,1.45)
  rect 1.702x1.702 smd mask+0.025: 9(0,0)
  silkscreen extent -2.01,1.16 -1.68,1.48, body extent -1.55,-1.55 1.55,1.55, height 0.89
CAP_TANT_1206_POL [mm] "Imperial 1206, Metric 3216"
  rect 2.2x1.35 smd: 1(-1.41,0) 2(1.41,0)
  silkscreen extent -3.84,-0.94 0.4,2.26, body extent -1.6,-0.8 1.6,0.8, height 2.1
EP2RKU+ [mil] "2 Ways MMIC Power Splitter, DC - 18000 MHz, 50?"
  rrect100% 35x12 smd paste+0 mask+0: 1(-96.5,70) 2(-96.5,50) 3(-96.5,30) 4(-96.5,10) 5(-96.5,-10) 6(-96.5,-30) 7(-96.5,-50) 8(-96.5,-70) 17(96.5,-70) 18(96.5,-50) 19(96.5,-30) 20(96.5,-10) 21(96.5,10) 22(96.5,30) 23(96.5,50) 24(96.5,70)
  rrect100% 12x35 smd paste+0 mask+0: 9(-70,-96.5) 10(-50,-96.5) 11(-30,-96.5) 12(-10,-96.5) 13(10,-96.5) 14(30,-96.5) 15(50,-96.5) 16(70,-96.5) 25(70,96.5) 26(50,96.5) 27(30,96.5) 28(10,96.5) 29(-10,96.5) 30(-30,96.5) 31(-50,96.5) 32(-70,96.5)
  round 99 smd paste+0 mask+0: 33(0,0)
  Top Layer region: -55,-55 55,-55 55,55 -47,55 -55,47 -55,-55
  silkscreen extent -142,-101 101,101, body extent -118,-118 118,118, height 10
EP4RKU+ [mil] "DG1677-2"
  rrect100% 35x12 smd paste+0 mask+0: 1(-96.5,70) 2(-96.5,50) 3(-96.5,30) 4(-96.5,10) 5(-96.5,-10) 6(-96.5,-30) 7(-96.5,-50) 8(-96.5,-70) 17(96.5,-70) 18(96.5,-50) 19(96.5,-30) 20(96.5,-10) 21(96.5,10) 22(96.5,30) 23(96.5,50) 24(96.5,70)
  rrect100% 12x35 smd paste+0 mask+0: 9(-70,-96.5) 10(-50,-96.5) 11(-30,-96.5) 12(-10,-96.5) 13(10,-96.5) 14(30,-96.5) 15(50,-96.5) 16(70,-96.5) 25(70,96.5) 26(50,96.5) 27(30,96.5) 28(10,96.5) 29(-10,96.5) 30(-30,96.5) 31(-50,96.5) 32(-70,96.5)
  rect 10x10 smd paste+0 mask+0: 33(0,0)
  Top Layer region: -55,-55 -55,50 -50,55 55,55 55,-55
  silkscreen extent -141,-101 101,101, body extent -118,-118 118,118, height 10
HDR1X2 [mm] "Connector; Header; 2 Position"
  rect 1.5x1.5 hole 0.9: 1(0,0)
  round 1.5 hole 0.9: 2(2.54,0)
  silkscreen extent -1.27,-1.27 3.81,1.27
HMC8191_E-24-1 [mm] "HMC8191_E-24-1"
  rect 0.5x0.305 smd mask+0.025: 1(-1.872,1.25)
  oval 0.5x0.305 smd mask+0.025: 2(-1.872,0.75) 3(-1.872,0.25) 4(-1.872,-0.25) 5(-1.872,-0.75) 6(-1.872,-1.25) 13(1.872,-1.25) 14(1.872,-0.75) 15(1.872,-0.25) 16(1.872,0.25) 17(1.872,0.75) 18(1.872,1.25)
  oval 0.305x0.5 smd mask+0.025: 7(-1.25,-1.872) 8(-0.75,-1.872) 9(-0.25,-1.872) 10(0.25,-1.872) 11(0.75,-1.872) 12(1.25,-1.872) 19(1.25,1.872) 20(0.75,1.872) 21(0.25,1.872) 22(-0.25,1.872) 23(-0.75,1.872) 24(-1.25,1.872)
  rect 2.5x2.5 smd paste-1.237 mask+0.025: 25(0,0)
  silkscreen extent -2.08,-2.78 2.08,2.78, body extent 0,0 0.25,0.25, height 0.25
Johanson-0201 [mm] "Chip Capacitor, 2-Leads, Body 0.82x0.37mm, IPC Medium Density"
  rect 0.36x0.41 smd mask+0.05: 1(-0.33,0) 2(0.33,0)
  body extent -0.51,-0.2 0.51,0.21, height 0.6
JOHN-142-0761-801 [mil] "CONN SMA JACK STR 50OHM EDGE MNT"
  rect 10x10 smd paste-10 mask+4: 1(0,-31) 6(-149,-21) 7(151,-19)
  round 57 hole 45: 2(-48,-69) 3(48,-69) 4(-48,-156) 5(48,-156)
  Top Layer region: -160,-218 -14.5,-218 -14.5,-10 -160,-10
  Top Layer region: 14.5,-218 160,-218 160,-10 14.5,-10
  Top Layer region: -8.5,-218 8.5,-218 8.5,-10 -8.5,-10
LED-SMD-0603 [mm] "SMD Body 1.6x0.8mm, IPC High Density"
  rect 0.8x0.9 smd: 1(-0.7,0) 2(0.7,0)
  silkscreen extent -1.45,-0.84 1.57,0.86, body extent -0.87,-0.48 0.87,0.48, height 1.3
LFCSP_WD-8 [mm] "CP_8_21, ADM7172"
  rect 0.6x0.3 smd mask+0.025: 1(-1.3,0.75) 2(-1.3,0.25) 3(-1.3,-0.25) 4(-1.3,-0.75) 5(1.3,-0.75) 6(1.3,-0.25) 7(1.3,0.25) 8(1.3,0.75)
  rect 1.6x2.44 smd mask+0.025: 9(0,0)
  silkscreen extent -1.5,-1.5 1.5,1.5, body extent 0,0 0.25,0.25, height 0.25
NJK36_TEX [mm] "LMH6882_WQFN"
  rect 0.6x0.25 smd paste+0 mask+0.051: 1(-2.952,2) 2(-2.952,1.5) 3(-2.952,1) 4(-2.952,0.5) 5(-2.952,0) 6(-2.952,-0.5) 7(-2.952,-1) 8(-2.952,-1.5) 9(-2.952,-2) 19(2.952,-2) 20(2.952,-1.5) 21(2.952,-1) 22(2.952,-0.5) 23(2.952,0) 24(2.952,0.5) 25(2.952,1) 26(2.952,1.5) 27(2.952,2)
  rect 0.25x0.6 smd paste+0 mask+0.051: 10(-2,-2.952) 11(-1.5,-2.952) 12(-1,-2.952) 13(-0.5,-2.952) 14(0,-2.952) 15(0.5,-2.952) 16(1,-2.952) 17(1.5,-2.952) 18(2,-2.952) 28(2,2.952) 29(1.5,2.952) 30(1,2.952) 31(0.5,2.952) 32(0,2.952) 33(-0.5,2.952) 34(-1,2.952) 35(-1.5,2.952) 36(-2,2.952)
  rect 4.6x4.6 smd paste-2.287 mask+0.051: 37(0,0)
  silkscreen extent -3.13,-3.81 3.81,3.81, body extent 0,0 0.25,0.25, height 0.25
PQFN12-XHF-143M [mm] "PQFN, 12-Leads, Body 3.00x3.00mm, Pitch 0.51mm, Thermal Pad 1.25x1.25mm, IPC Medium Density"
  rect 0.46x0.25 smd mask+0.051: 1(-1.3,0.51) 2(-1.3,0) 3(-1.3,-0.51) 7(1.3,-0.51) 8(1.3,0) 9(1.3,0.51)
  rect 0.25x0.46 smd mask+0.051: 4(-0.51,-1.3) 5(0,-1.3) 6(0.51,-1.3) 10(0.51,1.3) 11(0,1.3) 12(-0.51,1.3)
  rect 1.25x1.25 smd mask+0.051: 13(0,0)
  silkscreen extent -2.28,-1.5 1.5,1.5, body extent -1.5,-1.5 1.5,1.5, height 0.89
SMA-J-P-H-ST-EM1 [mm] "SMA-J-P-H-ST-EM1"
  rect 1.27x3.6 smd: 1(0,0)
  rect 1.35x4.2 smd: 2_1(-2.825,0.2) 3_1(2.825,0.2)
  rect 1.35x4.2 smd far side: 2_2(-2.825,0.2) 3_2(2.825,0.2)
  silkscreen extent -1.9,-1.8 1.9,2.44
SMD-0402 [mm] "0402 Imperial"
  rect 0.65x0.65 smd mask+0.05: 1(-0.45,0) 2(0.45,0)
  body extent -0.5,-0.25 0.5,0.25, height 0.56
SMD-0603 [mm] "SMD Body 1.6x0.8mm, IPC High Density"
  rect 0.8x0.9 smd: 1(-0.7,0) 2(0.7,0)
  body extent -0.87,-0.48 0.87,0.48, height 1.3
SMD-0805 [mm] "Chip Capacitor, Body 2.0x1.3mm, IPC High Density, 0805 Imperial, 2012 Metric"
  rect 1.1x1.4 smd: 1(-0.75,0) 2(0.75,0)
  body extent -1.1,-0.72 1.1,0.72, height 1.4
TSW-101-15-T-S [mm] "CONN HEADER VERT 1POS"
  round 1.5 hole 0.9: 1(0,0)
XFMR_ADT1-1+ [mm] "RF Transformer 50ohm 1.0 0.15 to 400 MHz"
  rect 2.54x1.65 smd: 1(-2.54,2.54) 2(-2.54,0) 3(-2.54,-2.54) 4(2.54,-2.54) 5(2.54,0) 6(2.54,2.54)
  silkscreen extent -4.7,-3.94 2.8,3.94

## Part data
C22 C23 C24 C26 C28 C29 C30_U_HPF1 C30_U_HPF2 C31_U_HPF1 C31_U_HPF2 C57 C58 C62_U_HPF1 C62_U_HPF2 C70_U_LDO_C1 C70_U_LDO_C2 C70_U_LDO_C3 C70_U_LDO_C4 C70_U_LDO_C5 C71_U_LDO_C1 C71_U_LDO_C2 C71_U_LDO_C3 C71_U_LDO_C4 C71_U_LDO_C5 C72_U_LDO_C1 C72_U_LDO_C2 C72_U_LDO_C3 C72_U_LDO_C4 C72_U_LDO_C5: library part CAP0603, "Ceramic Capacitor 0603"
C25 C63: library part CAP_RF_0402, "Broadband Ceramic Capacitor X7R 0402 (1005 Metric)"
C32_U_RF_AMP1 C32_U_RF_AMP2 C32_U_RF_AMP3 C32_U_RF_AMP4 C33_U_RF_AMP1 C33_U_RF_AMP2 C33_U_RF_AMP3 C33_U_RF_AMP4 C34_U_RF_AMP1 C34_U_RF_AMP2 C34_U_RF_AMP3 C34_U_RF_AMP4 C35_U_RF_AMP1 C35_U_RF_AMP2 C35_U_RF_AMP3 C35_U_RF_AMP4 C48 C49 C53 C54 C55 C56: library part CAP0402, "Ceramic Capacitor 0402"
C52 C141: library part CAP_TANT_1206, "Polarized Cap, Size 1206 Imperial (3216 Metric), Tantalum"
C65 C67: library part CAP_RF_0201, "Broadband Capacitor 0201 Imperial"
D2: "LED 0603"
FL1: "Reflectionless High Pass Filter 50Ω 13900 to19000 MHz"
J1 J3 J4 J5 J6 J7 J8: "CONN SMA JACK STR 50OHM EDGE MNT"
J2: "USB - micro B USB 2.0 Receptacle Connector 5 Position Surface Mount, Right Angle; Through Hole", Package=None, Availability=Good, Check_prices=https://www.snapeda.com/parts/10103594-0001LF/Amphenol%20FCI/view-part/5161044/?ref=eda, MF="Amphenol ICC (FCI)", MP=10103594-0001LF, Price=None, Purchase-URL=https://pricing.snapeda.com/search/part/10103594-0001LF/?ref=eda, SnapEDA_Link=https://www.snapeda.com/parts/10103594-0001LF/Amphenol%20FCI/view-part/5161044/?ref=snap
J9 J13: "Connector SMA F 50Ohm Solder ST Edge Mount Gold Over Nickel Tray", Package=None, Availability=Unavailable, MF=Samtec, MP=SMA-J-P-H-ST-EM1, Price=None, SnapEDA_Link=https://www.snapeda.com/parts/SMA-J-P-H-ST-EM1/Samtec%20Inc./view-part/?ref=snap
L2_U_HPF1 L2_U_HPF2 L4_U_HPF1 L4_U_HPF2 L5 L6: library part L0603, "Inductor 0603"
L3_U_RF_AMP1 L3_U_RF_AMP2 L3_U_RF_AMP3 L3_U_RF_AMP4: library part L0805, "Inductor 0805"
P2 P3: "Header, 2-Pin", LatestRevisionDate=17-Jul-2002, LatestRevisionNote="Re-released for DXP Platform.", Publisher="Altium Limited"
R3 R44: library part RES_RF_0402, "High Frequency Resistor 0402"
R14 R15 R16 R19 R26 R27 R28 R29 R30 R31 R33 R34 R35 R36 R37 R38 R39 R94_U_LDO_C1 R94_U_LDO_C2 R94_U_LDO_C3 R94_U_LDO_C4 R94_U_LDO_C5 R95_U_LDO_C1 R95_U_LDO_C2 R95_U_LDO_C3 R95_U_LDO_C4 R95_U_LDO_C5 R98_U_LDO_C1 R98_U_LDO_C2 R98_U_LDO_C3 R98_U_LDO_C4 R98_U_LDO_C5 R103_U_LDO_C1 R103_U_LDO_C2 R103_U_LDO_C3 R103_U_LDO_C4 R103_U_LDO_C5: library part RES0603, "Resistor-0603"
R18 R21 R22 R23 R24 R25 R32: library part RES0402, "Resistor-0402"
SW2: "Dip Switch SPST 8 Position Surface Mount Slide (Standard) Actuator 25mA 24VDC", Built_By=EMA_Kyle, Copyright="Copyright (C) 2018 Accelerated Designs. All rights reserved", Manufacturer_Part_Number=A6S-8104-H, RefDes=RefDes, SourceLibrary=Omron_2019-09-26, Type=DEV, Vendor=Omron
T1 T2: "RF Transformer, 50 ohm, 1:1, 0.15-400 MHz, SMT", Package=None, Availability=Unavailable, MF=Mini-Circuits, MP=ADT1-6T+, Price=None, SnapEDA_Link=https://www.snapeda.com/parts/ADT1-6T+/Mini-Circuits/view-part/948642/?ref=snap
TP1: "CONN HEADER VERT 1POS"
U1: "2 Ways MMIC Power Splitter, DC - 18000 MHz, 50Ω"
U3_U_SPLIT41 U3_U_SPLIT42: "Power Splitter/Combiner 4 Way-0° 50Ω DC to 18 GHz"
U13_U_LDO_C1 U13_U_LDO_C2 U13_U_LDO_C3 U13_U_LDO_C4 U13_U_LDO_C5: "6.5V, 2A, Ultralow Noise, High PSRR, Fast Transient Response CMOS LDO", RefDes=RefDes, Type=Type
U17: library part LMH6882, "LMH6882 DC to 2.4-GHz, High-Linearity, Dual, Programmable Differential Amplifier", Built_By=EMA_UL_Team, Copyright="Copyright (C) 2018 Accelerated Designs. All rights reserved", Manufacturer_Part_Number=LMH6882SQ/NOPB, RefDes=RefDes, SourceLibrary=TI_2017-02-16, Type=DEV, Vendor="Texas Instruments"
U19: "6 GHz to 26.5 GHz, / Wideband I/Q Mixer", Copyright="Copyright (C) 2018 Accelerated Designs. All rights reserved", RefDes=RefDes, Type=DEV
U20_U_RF_AMP1 U20_U_RF_AMP2 U20_U_RF_AMP3 U20_U_RF_AMP4: "Wideband, Microwave, Monolithic Amplifier, 50Ω, 5 to 18 GHz"

## Free pads (board coordinates)
  round 120 hole 120 unplated: 1(1100,2600) 1(1100,5200) 1(3900,2600) 1(3900,5200)

## Via types
v1: diameter 12, hole 6, Top Layer to Bottom Layer, tented both sides, 958 vias
v2: diameter 20, hole 10, Top Layer to Bottom Layer, tented both sides, 107 vias
v3: diameter 22, hole 10, Top Layer to Bottom Layer, tented both sides, 9 vias

## Nets (pads, with @x,y where several pads share a name; then routed paths per layer and width w, separated by ;. In a path a pad name is that pad's centre, name@x,y a point inside that pad or via, vN(x,y) a via of type N, cw(c..) or ccw(c..) an arc to the next point about the centre after c; other vN are vias at no path point)
5V: C52.1 C53.2 C54.2 C55.2 C56.2 C71_U_LDO_C3.2 R14.2 R15.2 R35.2 R36.2 R94_U_LDO_C3.2 U13_U_LDO_C3.1 U13_U_LDO_C3.2 U17.3 U17.4 U17.24 U17.25 | length 2319.4
  Top Layer w10: U17.3@1945.87,2827.44 1945.87,2798.57 1941.77,2794.47 1941.77,2775.51 C56.2@1933.98,2767.72 C55.2@1978.98,2767.72 1971.18,2775.51 1971.18,2792.94 1965.55,2798.57 U17.4@1965.55,2827.44 ; U17.25@1945.87,3059.91 1945.87,3089.59 1940.97,3094.49 1940.97,3115.29 C53.2@1933.98,3122.28 C54.2@1978.98,3122.28 1971.22,3114.52 1971.22,3094.49 1965.55,3088.82 U17.24@1965.55,3059.91
  Top Layer w20: v2(1934.49,3210) 2093.98,3210 C52.1@2108.98,3195 ; C54.2@1978.98,3122.28 2041.26,3122.28 2070.07,3151.09 2070.07,3178.43 2086.64,3195 2098.46,3195 2113.98,3179.49 2113.98,3135 2156.42,3092.56 R14.2@2268.98,3092.56
  Top Layer w30: C55.2@1978.98,2767.72 2011.26,2767.72 v2(2018.98,2760) ; v2(2193.98,2815) 2218.98,2815 2235.79,2798.19 2268.23,2798.19 R15.2@2268.98,2797.44 ; R14.2@2268.98,3092.56 v2@2268.98,3130
  Layer 2 w30: v2(2193.98,2815) 2138.98,2760 v2(2018.98,2760) 2103.98,2845 2103.98,2965 v2(2270.2,3131.23)
  Bottom Layer w15: U13_U_LDO_C3.2@1904.86,3466.38 U13_U_LDO_C3.1@1924.54,3466.38 1924.54,3463.66 1937.57,3450.63 R94_U_LDO_C3.2@1937.57,3392.56 C71_U_LDO_C3.2@1937.57,3330
  Bottom Layer w20: R35.2@1853.98,3200.12 1914.09,3200.12 1923.98,3210
  Bottom Layer w30: R36.2@1863.98,2685 1928.98,2685 2003.98,2760 v2(2018.98,2760) ; v2(1934.49,3210) 1937.57,3213.09 C71_U_LDO_C3.2@1937.57,3330
5V5: C70_U_LDO_C1.2 C70_U_LDO_C2.2 C70_U_LDO_C3.2 C70_U_LDO_C4.2 C70_U_LDO_C5.2 C141.1 D2.1 J2.1 P2.1 P2.2 R98_U_LDO_C1.1 R98_U_LDO_C2.1 R98_U_LDO_C3.1 R98_U_LDO_C4.1 R98_U_LDO_C5.1 U13_U_LDO_C1.7 U13_U_LDO_C1.8 U13_U_LDO_C2.7 U13_U_LDO_C2.8 U13_U_LDO_C3.7 U13_U_LDO_C3.8 U13_U_LDO_C4.7 U13_U_LDO_C4.8 U13_U_LDO_C5.7 U13_U_LDO_C5.8 | length 1135.5
  Top Layer w15: D2.1@1357.56,4890 v2(1410,4890) ; v2(1480,5010) v2(1480,5045) 1480.81,5045.81 1480.81,5113.41 J2.1@1481.18,5113.78
  Top Layer w30: P2.1@1890,5105 P2.2@1890,5205 ; C70_U_LDO_C2.2@2500.87,4423.19 C70_U_LDO_C2.2@2503.31,4425.63 ; C70_U_LDO_C2.2@2503.31,4427.72 C70_U_LDO_C2.2@2503.31,4425.63 ; 2515,4365 2515,4370 2503.31,4381.69 C70_U_LDO_C2.2@2503.31,4425.63 ; v2(2532.56,4454.88) C70_U_LDO_C2.2@2503.31,4425.63 ; v2@2535,4452.44 2559.72,4427.72 2561.69,4427.72 2562.44,4426.97 R98_U_LDO_C2.1@2562.44,4425
  Top Layer w50: v2(1965,4910) 1983.43,4928.43 2042.91,4928.43 C141.1@2044.49,4930 ; v2(1965,4950) 1983.43,4931.57
  Bottom Layer w30: 1785,4780 1790,4780 1801.69,4768.31 C70_U_LDO_C1.2@1845,4768.31 ; C70_U_LDO_C1.2@1845,4767.56 1846.97,4767.56 1874.41,4795 v2(1879.41,4795) 1846.97,4827.44 R98_U_LDO_C1.1@1845,4827.44 ; R98_U_LDO_C3.1@1867.57,3632.56 1868.32,3633.31 1868.32,3635.28 v2(1897.57,3664.53) ; v2@1897.57,3664.41 1926.71,3635.28 1926.71,3589.25 1915.01,3577.56 1915.01,3572.56 ; 2672.56,3253.07 2672.56,3248.07 2660.87,3236.38 2660.87,3190.35 2686.22,3165 2693.9,3165 2720,3191.1 R98_U_LDO_C5.1@2720,3193.07 ; 3000.57,3253.32 3000.57,3248.32 2988.13,3235.88 2988.13,3191.35 2988.87,3190.61 2990.84,3190.61 3018.07,3163.38 R98_U_LDO_C4.1@3048.01,3193.32
  other v2: 3020,3160 2690,3165
5V_U_LDO_C1: C32_U_RF_AMP1.2 C33_U_RF_AMP1.2 C34_U_RF_AMP1.1 C71_U_LDO_C1.2 L3_U_RF_AMP1.2 R94_U_LDO_C1.2 U13_U_LDO_C1.1 U13_U_LDO_C1.2 U20_U_RF_AMP1.7 | length 502.4
  Top Layer w10: U20_U_RF_AMP1.7@1560.54,4470.73 1574.83,4485.02 C34_U_RF_AMP1.1@1574.83,4523.65 1574.83,4578.37 1575.1,4578.65 1575.1,4628.85
  Top Layer w30: v2(1540,4710) 1562.54,4687.46 C32_U_RF_AMP1.2@1562.54,4643.65 ; 1580,4635 1580,4636.36 C33_U_RF_AMP1.2@1629.83,4636.36
  Bottom Layer w15: C71_U_LDO_C1.2@1540,4757.44 R94_U_LDO_C1.2@1605,4757.44 1663.07,4757.44 1676.1,4770.47 U13_U_LDO_C1.1@1678.82,4770.47 U13_U_LDO_C1.2@1678.82,4790.16
  Bottom Layer w30: v2(1540,4710) C71_U_LDO_C1.2@1540,4757.44
5V_U_LDO_C2: C32_U_RF_AMP2.2 C33_U_RF_AMP2.2 C34_U_RF_AMP2.1 C71_U_LDO_C2.2 L3_U_RF_AMP2.2 R94_U_LDO_C2.2 U13_U_LDO_C2.1 U13_U_LDO_C2.2 U20_U_RF_AMP2.7 | length 504.5
  Top Layer w10: U20_U_RF_AMP2.7@2235.73,4092.18 2244.59,4092.18 2258.88,4077.89 C34_U_RF_AMP2.1@2288.65,4077.89 2343.37,4077.89 L3_U_RF_AMP2.2@2343.65,4077.61 ; L3_U_RF_AMP2.2@2348.65,4077.61 C32_U_RF_AMP2.2@2403.65,4077.61 ; C33_U_RF_AMP2.2@2403.65,4032.57 v2(2403.65,4055.17) C32_U_RF_AMP2.2@2403.65,4077.61 ; C32_U_RF_AMP2.2@2403.65,4087.46 C32_U_RF_AMP2.2@2403.65,4077.61
  Top Layer w15: C71_U_LDO_C2.2@2492.44,4120 R94_U_LDO_C2.2@2492.44,4185 2492.44,4243.07 2505.47,4256.1 U13_U_LDO_C2.1@2505.47,4258.82 U13_U_LDO_C2.2@2525.16,4258.82
  Top Layer w30: v2(2403.65,4055.17) 2429.58,4055.17 2492.44,4118.03 C71_U_LDO_C2.2@2492.44,4120
5V_U_LDO_C4: C32_U_RF_AMP3.2 C33_U_RF_AMP3.2 C34_U_RF_AMP3.1 C71_U_LDO_C4.2 L3_U_RF_AMP3.2 R94_U_LDO_C4.2 U13_U_LDO_C4.1 U13_U_LDO_C4.2 U20_U_RF_AMP3.7 | length 660.6
  Top Layer w10: C33_U_RF_AMP3.2@2735.88,3586.35 v2(2758.49,3586.35) C32_U_RF_AMP3.2@2780.93,3586.35 ; L3_U_RF_AMP3.2@2780.93,3641.35 C32_U_RF_AMP3.2@2780.93,3586.35 ; L3_U_RF_AMP3.2@2780.93,3646.35 2781.2,3646.63 C34_U_RF_AMP3.1@2781.2,3701.35 2781.2,3731.12 2795.5,3745.41 U20_U_RF_AMP3.7@2795.5,3754.27 ; C32_U_RF_AMP3.2@2790.77,3586.35 C32_U_RF_AMP3.2@2780.93,3586.35
  Layer 2 w30: v2(2758.49,3586.35) 2758.49,3556.51 2815,3500 v2(2930,3500)
  Bottom Layer w15: R94_U_LDO_C4.2@2978.01,3431.35 2978.01,3375.25 2991.04,3362.22 U13_U_LDO_C4.1@2991.04,3359.5 U13_U_LDO_C4.2@3010.72,3359.5 ; R94_U_LDO_C4.2@2978.01,3433.32 C71_U_LDO_C4.2@2978.01,3498.32
  Bottom Layer w30: v2(2930,3500) 2931.68,3498.32 C71_U_LDO_C4.2@2978.01,3498.32 ; R94_U_LDO_C4.2@2977.26,3432.27 2978.01,3433.02 R94_U_LDO_C4.2@2978.01,3433.32
5V_U_LDO_C5: C32_U_RF_AMP4.2 C33_U_RF_AMP4.2 C34_U_RF_AMP4.1 C71_U_LDO_C5.2 L3_U_RF_AMP4.2 R94_U_LDO_C5.2 U13_U_LDO_C5.1 U13_U_LDO_C5.2 U20_U_RF_AMP4.7 | length 633.7
  Top Layer w10: C33_U_RF_AMP4.2@2440.39,3587.91 v2(2462.99,3587.91) C32_U_RF_AMP4.2@2485.43,3587.91 ; L3_U_RF_AMP4.2@2485.43,3642.91 C32_U_RF_AMP4.2@2485.43,3587.91 ; L3_U_RF_AMP4.2@2485.43,3647.91 2485.71,3648.19 C34_U_RF_AMP4.1@2485.71,3702.91 2485.71,3732.68 2500,3746.97 U20_U_RF_AMP4.7@2500,3755.83 ; C32_U_RF_AMP4.2@2495.28,3587.91 C32_U_RF_AMP4.2@2485.43,3587.91
  Layer 2 w30: v2(2462.99,3587.91) 2462.99,3552.01 2515,3500 v2(2605,3500)
  Bottom Layer w15: R94_U_LDO_C5.2@2650,3431.1 2650,3375 2663.03,3361.97 U13_U_LDO_C5.1@2663.03,3359.25 U13_U_LDO_C5.2@2682.72,3359.25 ; R94_U_LDO_C5.2@2650,3433.07 C71_U_LDO_C5.2@2650,3498.07
  Bottom Layer w30: v2(2605,3500) 2649.25,3500 2650,3499.25 C71_U_LDO_C5.2@2650,3498.07 ; R94_U_LDO_C5.2@2650,3431.1 R94_U_LDO_C5.2@2650,3433.07
FPGA_RX: J6.1 U3_U_SPLIT41.27 | length 1628.3
  Top Layer w17: v2(2900,4750) 2900,5085 ; 3500,3705 v2@3500,3879.8
  Bottom Layer w17: v2(2900,4750) 2900,4480 v2(3500,3880)
FPGA_TX: J1.1 U3_U_SPLIT42.27 | length 180
  Top Layer w17: 3500,4905 3500,5085